# EAGLE board v5-Relay-Section (EAGLE 7.5.0)
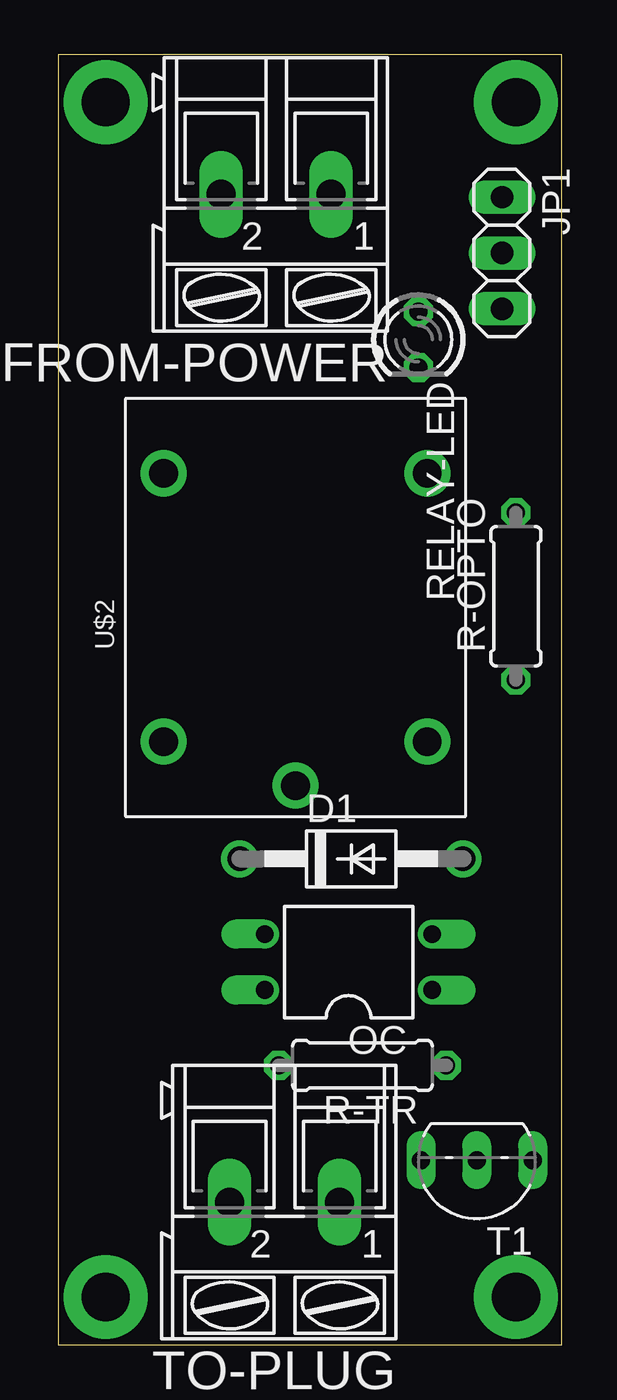
[diagram p0: board, top side]
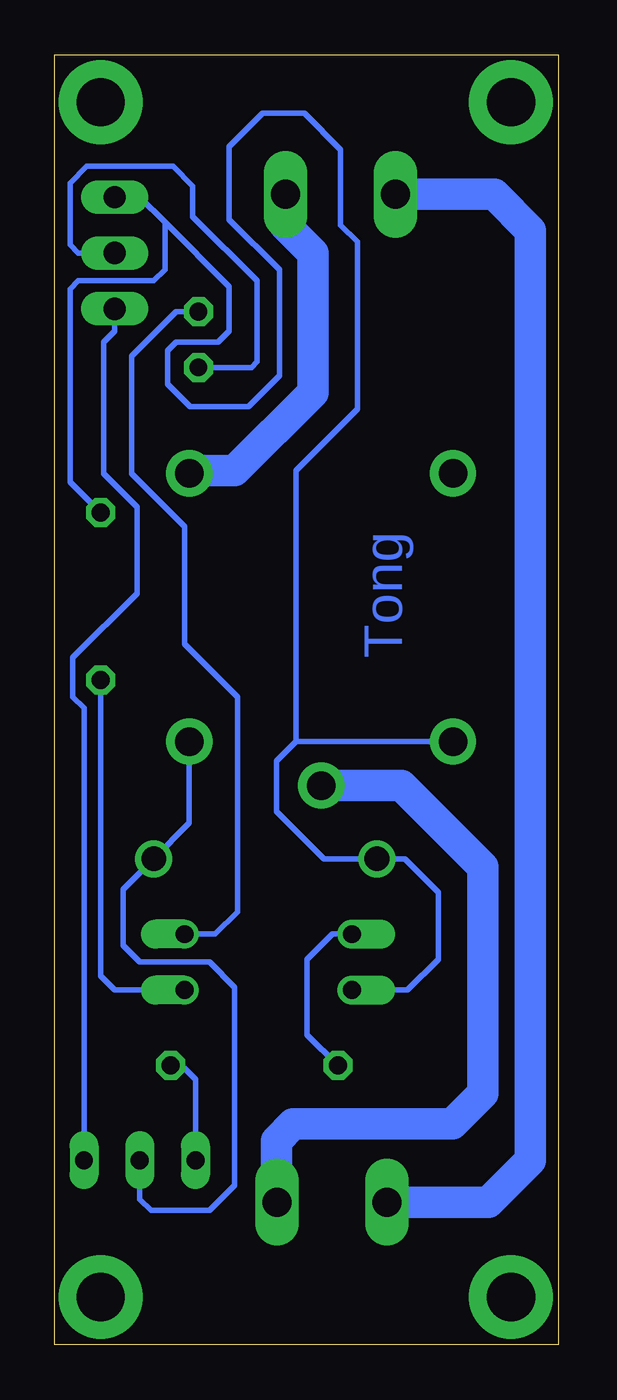
[diagram p1: board, bottom side, seen from below]

Size 22.91 x 58.66 mm. Coordinates in mm from the lower left corner, seen from the top.
Outline: 0,0 22.91,0 22.91,58.66 0,58.66 0,0
Copper layers (1*16): Top 0.035mm / dielectric 1.5mm / Bottom 0.035mm
Design rules "default": minimum track width 10mil, minimum drill 24mil, track to track 8mil, track to pad 8mil, pad to pad 8mil, via to via 8mil, smd to smd 8mil, copper to edge 40mil, drill to drill 8mil, minimum pad ring 10mil, minimum via ring 8mil, stop-mask expansion 4mil, vias tented up to drill 0mil, thermal gap 10mil

## Footprints (pad centres in the part's own frame; a part is rotated, then mirrored left to right if it is on the bottom)
DO41-10 = drill 1.118: A 5.08,0; C -5.08,0
AK300/2 = drill 1.321 long: 1 -2.515,0; 2 2.489,0
1X03 = drill 1.016 long: 1 -2.54,0; 2 0,0; 3 2.54,0
DIL04 = drill 0.813 offset: 1 -1.27,-3.81; 2 1.27,-3.81; 3 1.27,3.81; 4 -1.27,3.81
0207/7 = drill 0.813 octagon: 1 -3.81,0; 2 3.81,0
LED3MM = drill 0.813 octagon: A -1.27,0; K 1.27,0
TO92-ECB = drill 0.813 long: B 2.54,0; C 0,0; E -2.54,0
RELAY-SONGLE = drill 1.3 pad 2.1: COM -8.1,0; NC 6.1,6; NO 6.1,-6; V+ -6.1,6; V- -6.1,-6

## Placement (x,y rotation side)
D1  1N4004  [DO41-10]  13.34,22.1 0 top
FROM-POWER  [AK300/2]  9.91,52.32 180 top
JP1  [1X03]  20.19,49.66 270 top
OC  PC817  [DIL04]  13.21,17.4 90 top
R-OPTO  1k  [0207/7]  20.83,34.04 90 top
R-TR  510  [0207/7]  13.84,12.7 180 top
RELAY-LED  [LED3MM]  16.38,45.72 270 top
T1  2SC458  [TO92-ECB]  19.05,8.38 180 top
TO-PLUG  [AK300/2]  10.29,6.48 180 top
U$2  RELAY-SONGLE  [RELAY-SONGLE]  10.79,33.53 90 top

## Library data of the parts
D1 = diode
FROM-POWER TO-PLUG = con-ptr500; OC_FARNELL: unknown; OC_NEWARK: unknown
JP1 = pinhead
OC = optocoupler; MPN: PC817X4J000F; OC_FARNELL: 9707727; OC_NEWARK: 97K7059
R-OPTO R-TR = rcl
RELAY-LED = led
T1 = transistor
U$2 = Seeed-OPL-Relay

## Nets
+5V: D1.C JP1.1 OC.4 R-OPTO.2 U$2.V+
G-13: JP1.2 RELAY-LED.K
GND: JP1.3 T1.E
N$1: OC.3 R-TR.2
N$2: R-TR.1 T1.B
N$3: FROM-POWER.2 TO-PLUG.2
N$4: FROM-POWER.1 U$2.NO
N$5: TO-PLUG.1 U$2.COM
N$6: OC.2 RELAY-LED.A
N$13: OC.1 R-OPTO.1
N$18: D1.A T1.C U$2.V-

## Tracks (layer width: path | path; a pad name or v marks a point on that pad's centre or on a via)
+5V
  Bottom 0.254: 11.94,27.43 12.83,26.54 12.83,24.26 10.67,22.1 D1.C 6.99,22.1 5.46,20.57 5.46,17.53 6.86,16.13 OC.4 | 11.94,27.43 U$2.V+ | JP1.1 19.05,52.2 17.91,51.05 | 17.91,51.05 17.91,48.9 18.41,48.39 21.84,48.39 22.23,48.01 22.23,39.24 R-OPTO.2 | 11.94,27.43 11.94,39.75 9.14,42.55 9.14,50.16 9.91,50.93 9.91,54.36 11.56,56.01 13.46,56.01 14.99,54.48 14.99,51.18 12.7,48.9 12.7,44.07 14.1,42.67 16.76,42.67 17.78,43.69 17.78,45.21 17.4,45.59 15.49,45.59 14.99,46.1 14.99,48.13 17.91,51.05
  Bottom 0.406: U$2.V+
G-13
  Bottom 0.254: RELAY-LED.K 13.97,44.45 13.72,44.7 13.72,48.39 16.64,51.31 16.64,52.7 17.53,53.59 21.46,53.59 22.23,52.83 22.23,50.04 21.84,49.66 JP1.2
GND
  Bottom 0.254: T1.E 21.59,28.96 22.1,29.46 22.1,31.24 19.18,34.16 19.18,38.1 20.7,39.62 20.7,45.59 20.19,46.1 JP1.3
N$1
  Bottom 0.254: R-TR.2 11.43,14.1 11.43,17.53 10.29,18.67 OC.3
N$2
  Bottom 0.254: R-TR.1 17.14,12.7 16.51,12.06 T1.B
N$3
  Bottom 1.422: FROM-POWER.2 2.92,52.32 1.27,50.67 1.27,8.38 3.17,6.48 TO-PLUG.2
N$4
  Bottom 1.422: U$2.NO 16.67,39.75 14.73,39.75 11.18,43.31 11.18,49.66 12.45,50.93 12.45,52.3 FROM-POWER.1
N$5
  Bottom 1.422: U$2.COM 7.14,25.43 3.43,21.72 3.43,11.43 4.83,10.03 12.06,10.03 12.83,9.27 12.83,6.5 TO-PLUG.1
N$6
  Bottom 0.254: RELAY-LED.A 17.4,46.99 19.43,44.96 19.43,39.62 17.02,37.21 17.02,31.88 14.61,29.46 14.61,19.68 15.62,18.67 OC.2
N$7  (via drill 2.2 pad 3.81)
  other vias: 20.83,56.52
N$8  (via drill 2.2 pad 3.81)
  other vias: 2.16,56.52
N$9  (via drill 2.2 pad 3.81)
  other vias: 20.83,2.16
N$10  (via drill 2.2 pad 3.81)
  other vias: 2.16,2.16
N$13
  Bottom 0.254: R-OPTO.1 20.83,16.76 20.19,16.13 OC.1
N$18
  Bottom 0.254: U$2.V- 16.8,23.72 D1.A 19.81,20.7 19.81,18.16 19.05,17.4 15.88,17.4 14.73,16.26 14.73,7.24 15.88,6.1 18.54,6.1 19.05,6.6 T1.C

## Text on the board
Bottom: Tong